# EAGLE board darwin-atlas-module-DO (EAGLE 9.5.0)
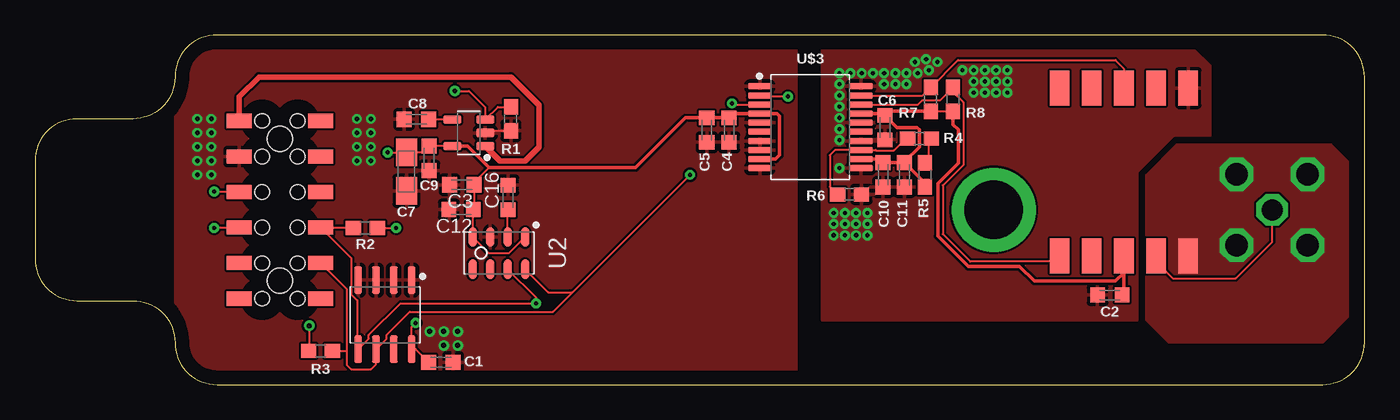
[diagram p0: board, top side]
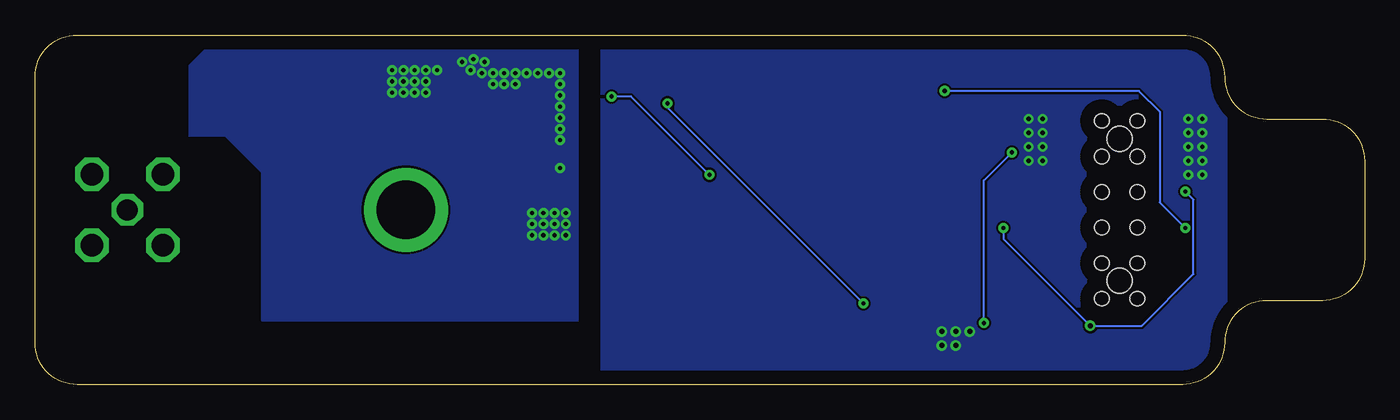
[diagram p1: board, bottom side, seen from below]

Size 95 x 25 mm. Coordinates in mm from the lower left corner, seen from the top.
Outline: 92,0 arc90 95,3 95,22 arc90 92,25 13,25 arc90 10,22 arc-90 7,19 3,19 arc90 0,16 0,9 arc90 3,6 7,6 arc-90 10,3 arc90 13,0 92,0
Copper layers (1*16): Top 0.035mm / dielectric 1.5mm / Bottom 0.035mm
Design rules "default *": minimum track width 6mil, minimum drill 0.3mm, track to track 6mil, track to pad 6mil, pad to pad 6mil, via to via 6mil, smd to smd 6mil, copper to edge 40mil, drill to drill 6mil, minimum pad ring 10mil, minimum via ring 8mil, stop-mask expansion 4mil, vias tented up to drill 0.3mm, thermal gap 10mil

## Footprints (pad centres in the part's own frame; a part is rotated, then mirrored left to right if it is on the bottom)
C0603K = smd 1.05 x 1.08: 1 -0.875,0; 2 0.875,0
A/3216-18R = smd 1.95 x 1.5: + 1.375,0; - -1.375,0
M20-7810645 = smd 1.02 x 1.78: P$1 -6.35,-2.91; P$2 -3.81,-2.91; P$3 -1.27,-2.91; P$4 1.27,-2.91; P$5 3.81,-2.91; P$6 6.35,-2.91; P$7 6.35,2.91; P$8 3.81,2.91; P$9 1.27,2.91; P$10 -1.27,2.91; P$11 -3.81,2.91; P$12 -6.35,2.91 | hole 1.02: -6.35,1.27; -3.81,1.27; -1.27,1.27; 1.27,1.27; 3.81,1.27; 6.35,1.27; 6.35,-1.27; 3.81,-1.27; 1.27,-1.27; -1.27,-1.27; -3.81,-1.27; -6.35,-1.27 | hole 1.8: -5.08,0; 5.08,0
0603 = smd 1.1 x 1: 1 -0.85,0; 2 0.85,0
SON125P300X500X110-8 = smd 1.412 x 0.582: 1 -1.15,1.875; 2 -1.15,0.625; 3 -1.15,-0.625; 4 -1.15,-1.875; 5 1.15,-1.875; 6 1.15,-0.625; 7 1.15,0.625; 8 1.15,1.875
SOIC127P600X175-8 = smd 1.968 x 0.569: 1 -2.473,1.905; 2 -2.473,0.635; 3 -2.473,-0.635; 4 -2.473,-1.905; 5 2.473,-1.905; 6 2.473,-0.635; 7 2.473,0.635; 8 2.473,1.905
5-1814832-1 = drill 1.6 octagon: G1 -2.54,2.54; G2 -2.54,-2.54; G3 2.54,-2.54; G4 2.54,2.54 | drill 1.5 octagon: PIN 0,0
ATLAS-10P = smd 2.5 x 1.4: PAD1 -6,5; PAD2 -6,2.7; PAD3 -6,0.4; PAD4 -6,-1.9; PAD5 -6,-4.2; PAD6 6,-4.2; PAD7 6,-1.9; PAD8 6,0.4; PAD9 6,2.7; PAD10 6,5
SOP65P780X200-20 = smd 1.702 x 0.475: 1 -3.603,2.925; 2 -3.603,2.275; 3 -3.603,1.625; 4 -3.603,0.975; 5 -3.603,0.325; 6 -3.603,-0.325; 7 -3.603,-0.975; 8 -3.603,-1.625; 9 -3.603,-2.275; 10 -3.603,-2.925; 11 3.603,-2.925; 12 3.603,-2.275; 13 3.603,-1.625; 14 3.603,-0.975; 15 3.603,-0.325; 16 3.603,0.325; 17 3.603,0.975; 18 3.603,1.625; 19 3.603,2.275; 20 3.603,2.925
SOT95P280X145-5 = smd 1.262 x 0.609: 1 -1.175,0.95; 2 -1.175,0; 3 -1.175,-0.95; 4 1.175,-0.95; 5 1.175,0.95

## Placement (x,y rotation side)
C1  .1uf  [C0603K]  29,1.6 0 top
C2  .1uf  [C0603K]  76.8,6.4 180 top
C3  10uf  [C0603K]  30.49,14.29 180 top
C4  .1uf  [C0603K]  49.6,18.2 270 top
C5  10uf  [C0603K]  48,18.2 270 top
C6  .1uf  [C0603K]  60.73,18.38 270 top
C7  6.8uf  [A/3216-18R]  26.54,15.23 90 top
C8  [C0603K]  27.25,18.97 180 top
C9  .1uf  [C0603K]  28.17,16.18 270 top
C10  .1uf  [C0603K]  60.6,15 270 top
C11  10uf  [C0603K]  62.13,15 270 top
C12  .1uf  [C0603K]  30.45,12.51 180 top
C16  .1uf  [C0603K]  33.81,13.38 90 top
J1  2X6-HEADERS  [M20-7810645]  17.5,12.5 90 top
R1  100k  [0603]  34,19 90 top
R2  4.7k  [0603]  23.6,11.2 180 top
R3  4.7k  [0603]  20.4,2.4 0 top
R4  1.5k  [0603]  63.2,17.6 180 top
R5  1.5k  [0603]  63.6,15 90 top
R6  1.5k  [0603]  58.2,13.6 0 top
R7  4.7k  [0603]  64,20.4 90 top
R8  4.7k  [0603]  65.6,20.4 90 top
U2  MPL3115A2LGA8  [SON125P300X500X110-8]  33.15,9.4 270 top
U3  M24C02-WMN6TP  [SOIC127P600X175-8]  25,5 270 top
U$1  5-1814832-1  [5-1814832-1]  88.4,12.5 0 top
U$2  ATLAS10P  [ATLAS-10P]  78.2,15.2 90 top
U$3  ADM3260  [SOP65P780X200-20]  55.4,18.4 0 top
U$4  MIC5219-3.3YM5-TR  [SOT95P280X145-5]  31,18 180 top

## Library data of the parts
C1-C12 C16 = rcl; SPICEPREFIX: C
J1 U2 U3 U$1-U$4 = Conservify
R1-R8 = SparkFun-Resistors; PROD_ID: RES-07828

## Nets
3V3: C1.1 C3.1 C4.1 C5.1 C7.+ C9.1 C12.1 U2.1 U2.4 U3.8 U$3.4 U$3.9 U$4.5
CAP: C16.1 U2.2
ENABLE: J1.P$10 R1.2 U$4.3
G1: J1.P$11
G2: J1.P$12
GND: C1.2 C3.2 C4.2 C5.2 C7.- C8.2 C9.2 C12.2 C16.2 J1.P$8 R1.1 U2.3 U3.1 U3.2 U3.3 U3.4 U$3.1 U$3.5 U$3.7 U$3.8 U$3.10 U$4.2
I3V3: C2.1 C6.1 C10.1 C11.1 R5.1 R7.1 R8.1 U$2.PAD3 U$3.12 U$3.17
IGND: C2.2 C6.2 C10.2 C11.2 R6.2 U$2.PAD6 U$3.11 U$3.14 U$3.16 U$3.20
IN3V3: J1.P$9 R2.1 R3.1
ISCL: R7.2 U$2.PAD8 U$3.19
ISDA: R8.2 U$2.PAD1 U$3.18
MISO: J1.P$4
MOSI: J1.P$5
N$2: U$1.PIN U$2.PAD4
N$3: R4.1 R5.2
N$6: C8.1 U$4.4
NC: J1.P$1
PG: U$1.G1 U$1.G2 U$1.G3 U$1.G4 U$2.PAD5
SCK: J1.P$6
SCL: J1.P$2 R3.2 U2.8 U3.6 U$3.2
SDA: J1.P$3 R2.2 U2.7 U3.5 U$3.3
UNREG: J1.P$7 U$4.1
VSEL: R4.2 R6.1 U$3.13
WC: U3.7

## Tracks (layer width: path | path; a pad name or v marks a point on that pad's centre or on a via)
3V3  (via drill 0.3)
  Top 0.152: 29.95,17.05 U$4.5 C9.1 27.73,16.61 C7.+ v25.21,16.61 v25.2,16.6 | C1.1 27.2,2.53 | 27.2,2.53 27,2.73 | 27.2,2.53 U3.8 26.91,4.11 v27.2,4.4 | 32.45,15.52 31.37,14.44 C3.1 31.37,12.55 C12.1 31.27,12.46 U2.4 32.42,9.4 33.87,9.4 U2.1
  Top 0.254: U$3.9 52.92,16.12 53.2,16.4 53.2,19.2 53.02,19.38 U$3.4 49.9,19.38 C4.1 C5.1 46.48,19.07 42.92,15.52 32.45,15.52 30.92,17.05 U$4.5
  Bottom 0.152: v27.2,4.4 27.2,14.6 v25.2,16.6
CAP
  Top 0.152: U2.2 33.77,12.47 C16.1
ENABLE  (via drill 0.3, 0.35)
  Top 0.152: R1.2 33.08,19.85 U$4.3 32.17,19.82 31,21 v30,21 | v12.8,11.2 12.83,11.23 J1.P$10
  Bottom 0.152: v30,21 16.11,21 14.63,19.51 14.63,13.03 v12.8,11.2
GND  (via drill 0.3, 0.35)
  Top 0.152: U$4.2 32.33,18.15 R1.1
  other vias: 23,19 24,19 24,18 23,18 24,17 23,17 24,16 11.6,19 11.6,18 11.6,17 11.6,16 11.6,15 12.6,19 12.6,18 12.6,17 12.6,16 12.6,15 30.2,3.8 28.2,3.8 29.2,3.8 29.2,2.8 30.2,2.8 23,16
  pour Top: 10,25 54.4,25 54.4,0 10,0
  pour Bottom: 10,25 54.4,25 54.4,0 10,0
I3V3
  Top 0.152: 63.83,19.38 R7.1 R8.1
  Top 0.254: R8.1 65.6,18.6 65.97,18.23 65.97,15.84 64.52,14.38 64.52,10.62 66.69,8.44 70.36,8.44 71.4,7.4 77.2,7.4 77.8,8 U$2.PAD3 77.8,6.53 C2.1 | U$3.12 60.35,16.12 C10.1 C11.1 | C6.1 61.6,18.38 63.02,18.38 63.18,18.22 63.18,16.98 62.13,15.93 C11.1 | C11.1 63.6,14.4 R5.1 | U$3.17 60.61,19.38 C6.1 | C6.1 61.03,19.55 R7.1
IGND  (via drill 0.3)
  other vias: 57.47,15.47 57.47,17.47 57.47,18.27 57.47,19.07 57.47,19.87 57.47,20.67 57.47,21.47 57.07,12.27 57.87,12.27 58.67,12.27 59.47,12.27 57.07,11.47 57.87,11.47 58.67,11.47 57.07,10.67 59.47,11.47 58.27,22.27 59.07,22.27 59.87,22.27 60.67,21.47 61.47,21.47 62.27,21.47 60.67,22.27 61.47,22.27 62.27,22.27 57.47,22.27 63.07,22.27 63.87,22.47 63.67,23.27 64.47,23.07 62.87,23.07 66.27,22.47 67.07,22.47 67.87,22.47 68.67,22.47 69.47,22.47 67.07,21.67 67.87,21.67 68.67,21.67 69.47,21.67 67.07,20.87 67.87,20.87 68.67,20.87 69.47,20.87 57.87,10.67 58.67,10.67 59.47,10.67
  pour Bottom: 56.2,4.6 56.2,24 82.8,24 84,22.8 84,17.8 81.4,17.8 78.8,15.2 78.8,4.6
  pour Top: 84,17.8 84,22.8 82.8,24 56.2,24 56.2,4.6 78.8,4.6 78.8,15.2 81.4,17.8
IN3V3  (via drill 0.3, 0.35)
  Top 0.152: v19.6,4.2 19.6,2.45 R3.1 | R2.1 v25.8,11.2 | v12.8,13.8 14.56,13.8 J1.P$9
  Bottom 0.152: v25.8,11.2 25.8,10.4 v19.6,4.2 15.91,4.2 12.22,7.9 12.22,13.22 v12.8,13.8
ISCL
  Top 0.152: U$3.19 63.42,20.68 R7.2 65.95,23.2 77.2,23.2 77.8,22.6 U$2.PAD8
ISDA
  Top 0.152: U$3.18 63.1,20.02 63.41,20.33 64.68,20.33 R8.2 65.6,20.92 66.33,20.2 66.33,15.7 64.87,14.24 64.87,10.76 66.83,8.8 72.8,8.8 U$2.PAD1
N$1  (via drill 4.2 pad 6)
  other vias: 68.5,12.5
N$2
  Top 0.152: U$2.PAD4 80.1,8.8 81.3,7.6 85.8,7.6 88.4,10.2 U$1.PIN
N$3
  Top 0.152: R4.1 63.85,17.4 63.85,16.1 R5.2
N$6
  Top 0.152: C8.1 29.81,18.97 U$4.4
PG
  pour Top (no thermals): 79.4,4.6 79.4,15 81.6,17.2 92.6,17.2 93.8,16 93.8,4.8 92,3 81,3
SCL  (via drill 0.3)
  Top 0.152: J1.P$2 22.28,6.82 22.28,2.42 | 22.28,2.42 22.28,1.42 22.6,1.1 22.6,1.09 24,1.09 24.37,1.46 U3.6 25.12,3.28 25.12,3.54 26.78,5.2 37,5.2 38.4,6.6 | R3.2 22.26,2.4 22.28,2.42 | 38.4,6.6 v46.8,15 | v53.8,20.6 51.87,20.6 U$3.2 | U2.8 36.67,6.6 38.4,6.6
  Bottom 0.152: v46.8,15 52.4,20.6 v53.8,20.6
SDA  (via drill 0.3)
  Top 0.152: R2.2 22.72,11.23 J1.P$3 22.58,9.06 22.58,6.46 23.02,6.02 23.02,2.6 U3.5 23.85,3.28 23.85,3.54 26.11,5.8 v35.8,5.8 35.8,6.22 U2.7 | v49.8,20.11 49.88,20.02 U$3.3
  Bottom 0.152: v35.8,5.8 49.8,19.8 v49.8,20.11
UNREG
  Top 0.406: J1.P$7 14.59,20.59 16,22 34,22 36,20 36,17 35,16 33.23,16 U$4.1
VSEL
  Top 0.152: R4.2 62.22,17.6 61.37,16.75 60.1,16.75 60.07,16.77 U$3.13 57.17,16.77 56.8,16.4 56.8,14.15 R6.1